# EAGLE board pcb (EAGLE 9.7.0)
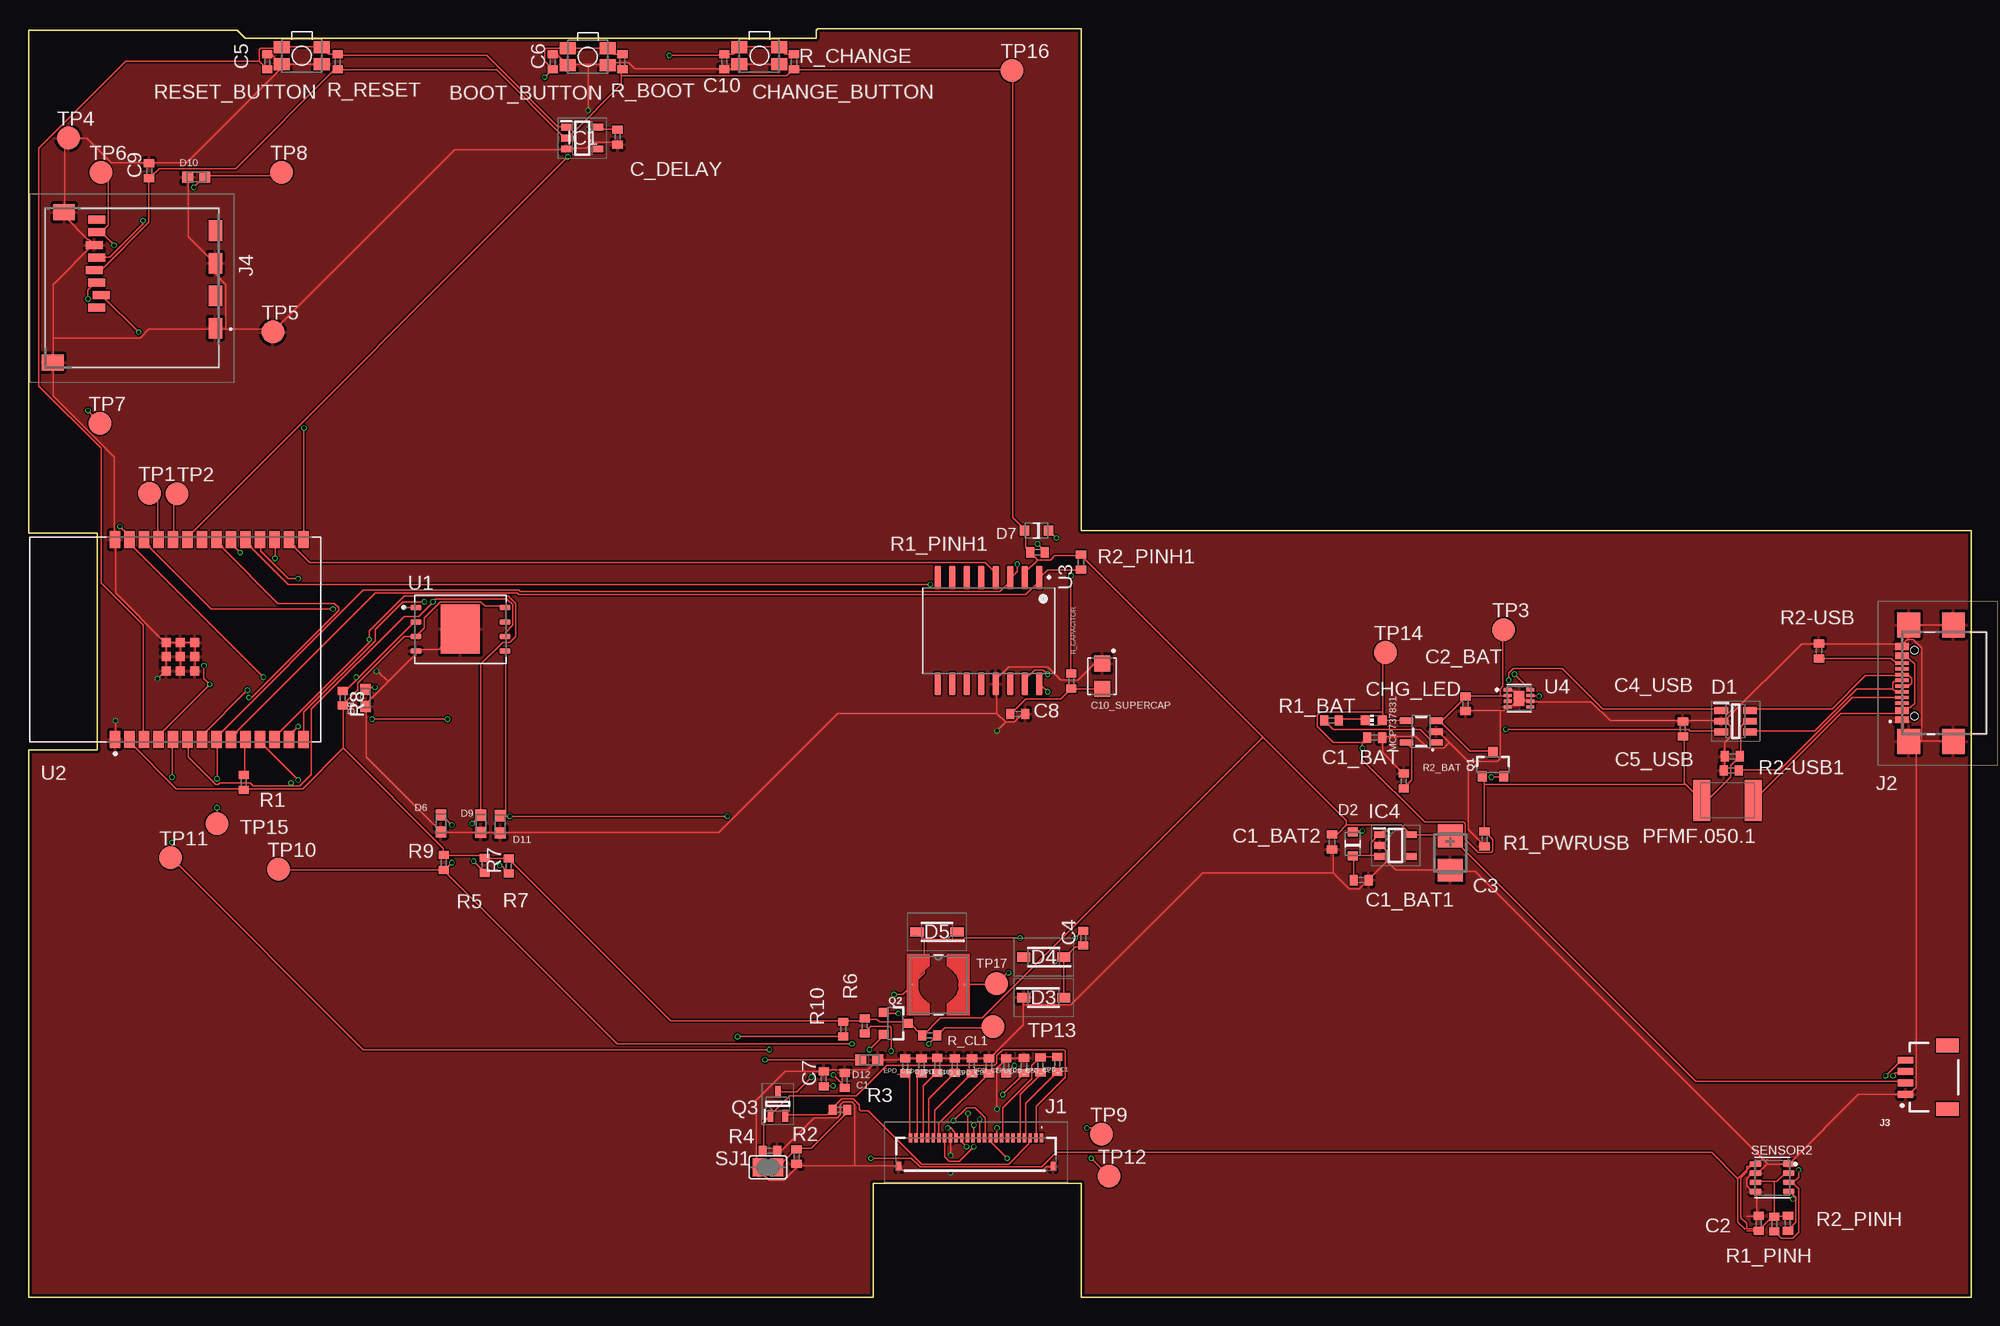
[diagram p0: board, top side]
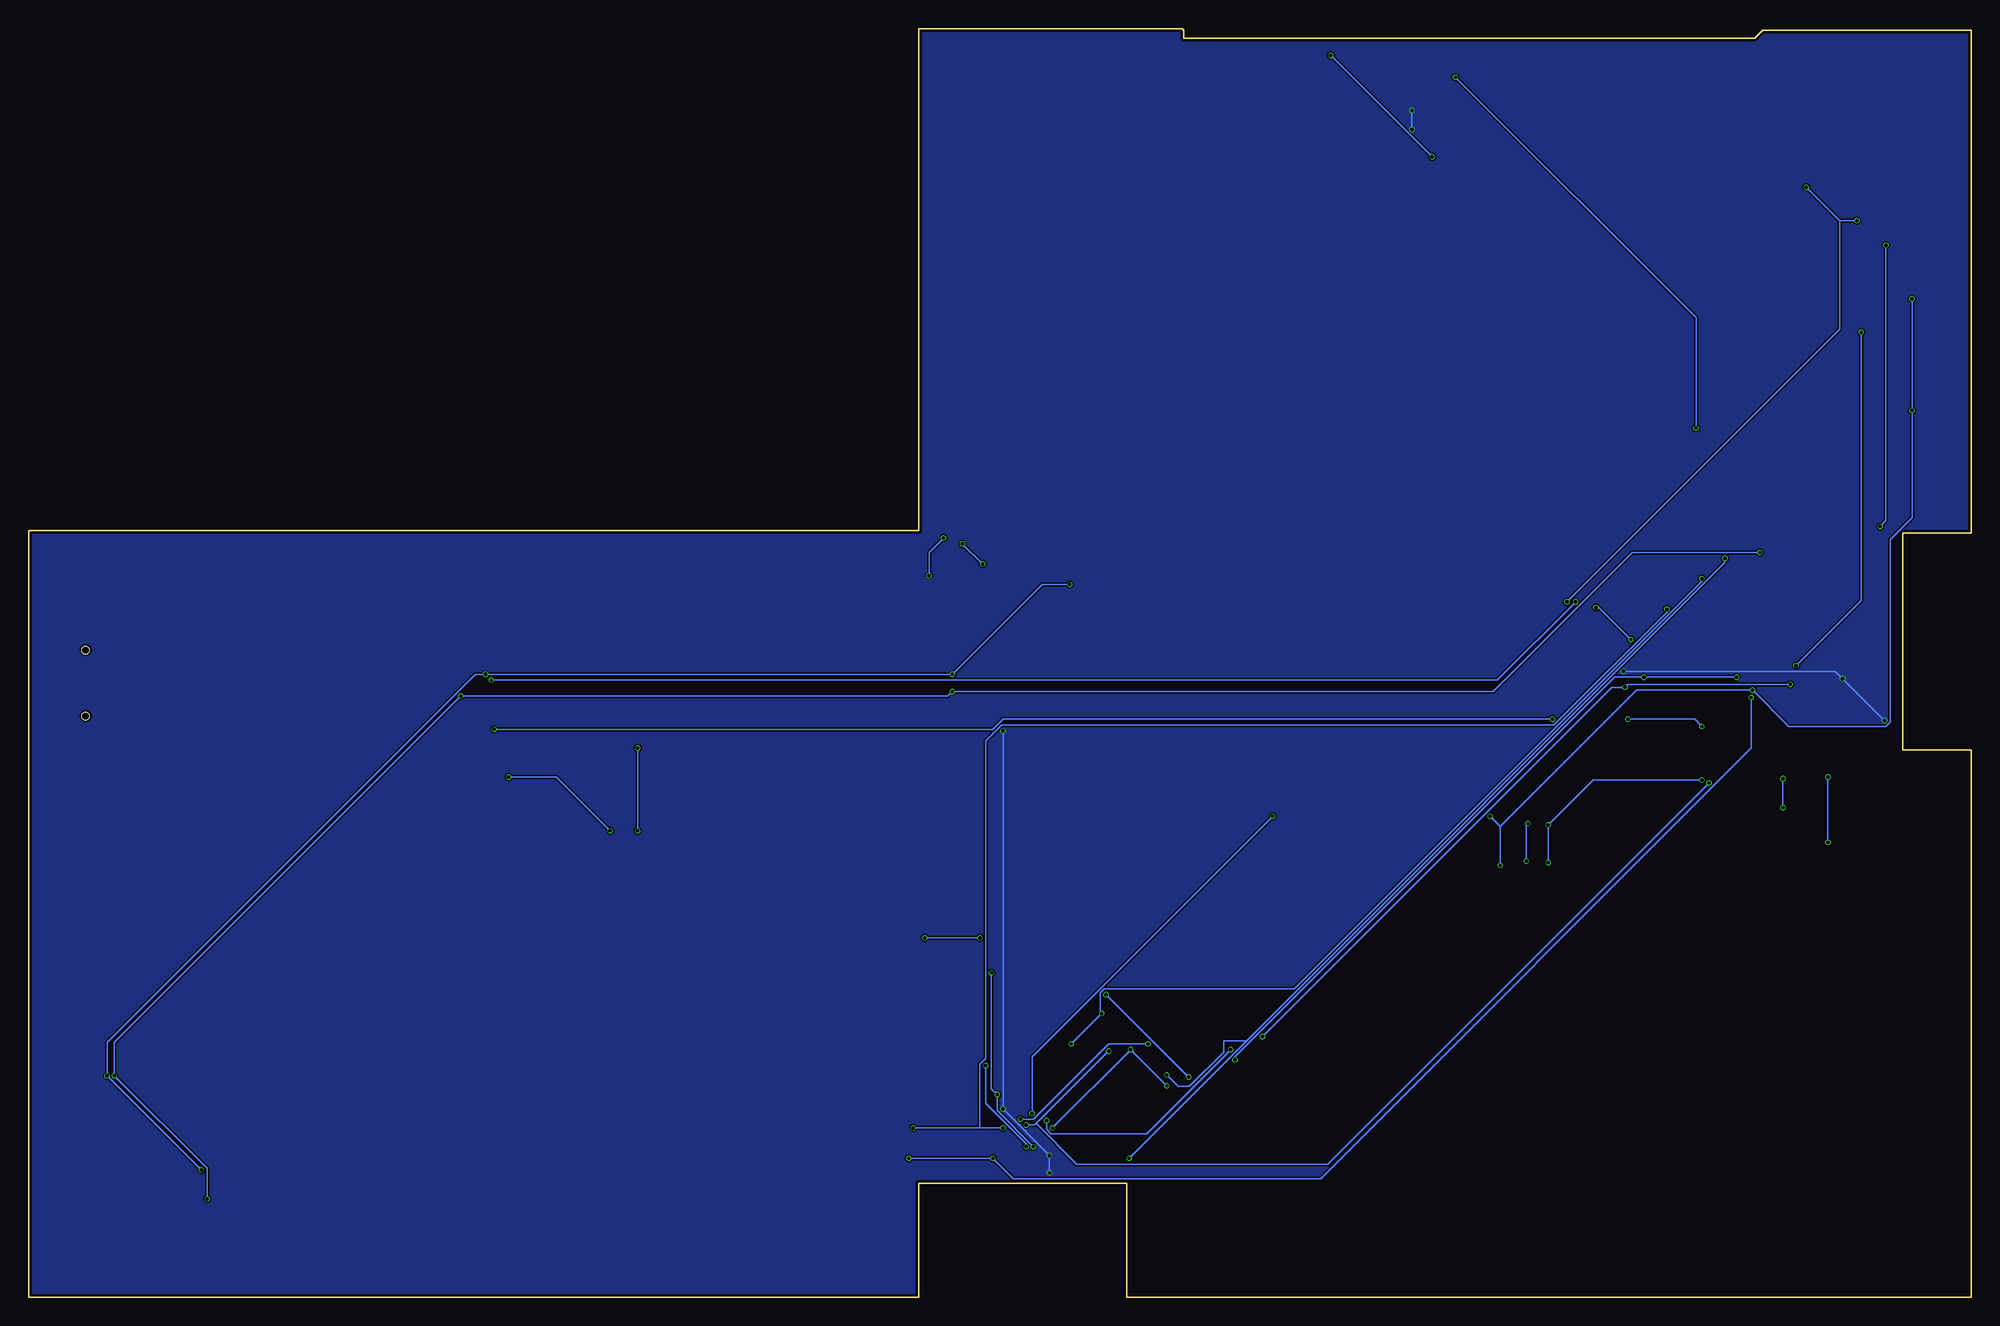
[diagram p1: board, bottom side, seen from below]

Size 170.2 x 111.2 mm. Coordinates in mm from the lower left corner, seen from the top.
Outline: 170.2,0 170.2,67.2 92.2,67.2 92.2,111.2 69.13,111.2 69,111.07 69,110.37 19,110.37 18.3,111.07 0.01,111.07 0.01,67 6,67 6,48 0,48 0,0 74,0 74,10 92.2,10 92.2,0 170.2,0
Copper layers (1*16): Top 0.035mm / dielectric 1.6mm / Bottom 0.035mm
Design rules "jlcpcb-2layers.dru": minimum track width 5mil, minimum drill 0.3mm, track to track 5mil, track to pad 5mil, pad to pad 5mil, via to via 5mil, smd to smd 5mil, copper to edge 0.2mm, drill to drill 6mil, minimum pad ring 10mil, minimum via ring 3mil, stop-mask expansion 4mil, vias tented up to drill 0mil, thermal gap 10mil

## Footprints (pad centres in the part's own frame; a part is rotated, then mirrored left to right if it is on the bottom)
MYBUTTON = smd 1.4 x 1.05: 1 1.75,0.75; 2 -1.75,0.75; 3 -1.75,-0.75; 4 1.75,-0.75
EAGLE-LTSPICE_C0402 = smd 0.7 x 0.9: 1 -0.65,0; 2 0.65,0
RCL_CT3528 = smd 2 x 2.2: + -1.5,0; - 1.5,0
CAPCP3225X100N = smd 1.4 x 1.4: 1 -1.1,0; 2 1.1,0
ADAFRUIT_CHIP-LED0603 = smd 0.8 x 0.8: A 0,-0.75; C 0,0.75
SOT95P280X145-6N = smd 1.2 x 0.6: 1 -1.25,0.95; 2 -1.25,0; 3 -1.25,-0.95; 4 1.25,-0.95; 5 1.25,0; 6 1.25,0.95
ESP32_WROVER_AVX---SD0805S020S1R0_AVX_SD0805S020S1R0_0 = smd 0.8 x 0.9: 1 -1.05,0; 2 1.05,0
SOD3716X135N = smd 1.15 x 0.8: 1 -1.75,0; 2 1.75,0
DIOC1608X36N = smd 0.97 x 0.94: 1 -0.75,0; 2 0.75,0
SOT95P280X125-5N = smd 0.9 x 0.6: 1 -1.4,0.95; 2 -1.4,0; 3 -1.4,-0.95; 4 1.4,-0.95; 5 1.4,0.95
SOT95P280X120-5N = smd 0.9 x 0.6: 1 -1.4,0.95; 2 -1.4,0; 3 -1.4,-0.95; 4 1.4,-0.95; 5 1.4,0.95
FH34SRJ24S05SH99 = smd 0.3 x 0.8: 1 5.75,1.45; 2 5.25,1.45; 3 4.75,1.45; 4 4.25,1.45; 5 3.75,1.45; 6 3.25,1.45; 7 2.75,1.45; 8 2.25,1.45; 9 1.75,1.45; 10 1.25,1.45; 11 0.75,1.45; 12 0.25,1.45; 13 -0.25,1.45; 14 -0.75,1.45; 15 -1.25,1.45; 16 -1.75,1.45; 17 -2.25,1.45; 18 -2.75,1.45; 19 -3.25,1.45; 20 -3.75,1.45; 21 -4.25,1.45; 22 -4.75,1.45; 23 -5.25,1.45; 24 -5.75,1.45 | smd 0.4 x 0.8: MP1 6.75,-1.05; MP2 -6.75,-1.05
SAMACSYS_PARTS_USB4110GFA = smd 0.3 x 1.15: A1 -3.35,3.678; A4 -2.55,3.678; A5 -1.25,3.678; A6 -0.25,3.678; A7 0.25,3.678; A8 1.25,3.678; A9 2.55,3.678; A12 3.35,3.678; B1 3.05,3.678; B4 2.25,3.678; B5 1.75,3.678; B6 0.75,3.678; B7 -0.75,3.678; B8 -1.75,3.678; B9 -2.25,3.678; B12 -3.05,3.678 | smd 2.18 x 2: MP1 -5.11,-0.827; MP2 5.11,-0.827; MP3 -5.11,3.103; MP4 5.11,3.103 | hole 0.65: -2.89,2.603; 2.89,2.603
JST04_1MM_RA = smd 0.6 x 1.35: 1 -1.5,0; 2 -0.5,0; 3 0.5,0; 4 1.5,0 | smd 1.2 x 2: NC1 2.8,-3.675; NC2 -2.8,-3.675
112ATAARR03ATTEND = smd 1.8 x 1.2: G1 10.6,10.4; G2 4.9,10.4; S1 7.75,10.4; S2 2.05,10.4 | smd 1.4 x 1.9: G3 13.6,-3.85; G4 0.45,-2.85 | smd 0.7 x 1.5: P1 8.8,0; P2 7.7,0.4; P3 6.6,0; P4 5.5,-0.2; P5 4.4,0; P6 3.3,-0.2; P7 2.2,0; P8 1.1,0
IND_4828-WE-TPC_WRE = smd 0.127 x 0.127: 1 -2.286,0; 2 2.286,0
ESP32_WROVER_SPARKFUN-IC-POWER_SOT23-5 = smd 0.55 x 1.2: 1 -0.95,-1.3; 2 0,-1.3; 3 0.95,-1.3; 4 0.95,1.3; 5 -0.95,1.3
ESP32C6_VARISTOR_CT/CN1812 = smd 1.5 x 3.6: 1 -2.25,0; 2 2.25,0
ESP32_WROVER_SPARKFUN-DISCRETESEMI_SOT23-3 = smd 0.8 x 0.9: 1 -0.95,-1; 2 0.95,-1; 3 0,1.1
SOT65P210X110-3N = smd 1.05 x 0.5: 1 -1.05,0.65; 2 -1.05,-0.65; 3 1.05,0
ESP32_WROVER_EAGLE-LTSPICE_R0402 = smd 0.7 x 0.9: 1 -0.65,0; 2 0.65,0
ESP32_WROVER_BME680_PSON80P300X300X100-8N = smd 1.016 x 0.5: 1 1.458,1.2; 2 1.458,0.4; 3 1.458,-0.4; 4 1.458,-1.2; 5 -1.458,-1.22; 6 -1.458,-0.4; 7 -1.458,0.4; 8 -1.458,1.2
SJ = smd 1.168 x 1.6: 1 -0.762,0; 2 0.762,0
TP20R = smd 2 x 2: TP 0,0
SON127P600X800X80-9N = smd 0.94 x 0.44: 1 -3.895,1.905; 2 -3.895,0.635; 3 -3.895,-0.635; 4 -3.895,-1.905; 5 3.895,-1.905; 6 3.895,-0.635; 7 3.895,0.635; 8 3.895,1.905 | smd 3.4 x 4.3: 9 0,0
XCVR_ESP32-C6-WROOM-1-N8 = smd 1.5 x 0.9: 1 -8.75,5.26; 2 -8.75,3.99; 3 -8.75,2.72; 4 -8.75,1.45; 5 -8.75,0.18; 6 -8.75,-1.09; 7 -8.75,-2.36; 8 -8.75,-3.63; 9 -8.75,-4.9; 10 -8.75,-6.17; 11 -8.75,-7.44; 12 -8.75,-8.71; 13 -8.75,-9.98; 14 -8.75,-11.25; 15 8.75,-11.25; 16 8.75,-9.98; 17 8.75,-8.71; 18 8.75,-7.44; 19 8.75,-6.17; 20 8.75,-4.9; 21 8.75,-3.63; 22 8.75,-2.36; 23 8.75,-1.09; 24 8.75,0.18; 25 8.75,1.45; 26 8.75,2.72; 27 8.75,3.99; 28 8.75,5.26 | smd 0.8 x 0.8: 29_1 -2.755,0.79; 29_2 -1.505,0.79; 29_3 -0.255,0.79; 29_4 -2.755,-0.46; 29_5 -1.505,-0.46; 29_6 -0.255,-0.46; 29_7 -2.755,-1.71; 29_8 -1.505,-1.71; 29_9 -0.255,-1.71
SOIC127P1032X265-16N = smd 2.05 x 0.59: 1 -4.655,4.445; 2 -4.655,3.175; 3 -4.655,1.905; 4 -4.655,0.635; 5 -4.655,-0.635; 6 -4.655,-1.905; 7 -4.655,-3.175; 8 -4.655,-4.445; 9 4.655,-4.445; 10 4.655,-3.175; 11 4.655,-1.905; 12 4.655,-0.635; 13 4.655,0.635; 14 4.655,1.905; 15 4.655,3.175; 16 4.655,4.445
SON50P200X200X80-9N = smd 0.76 x 0.27: 1 -0.985,0.75; 2 -0.985,0.25; 3 -0.985,-0.25; 4 -0.985,-0.75; 5 0.985,-0.75; 6 0.985,-0.25; 7 0.985,0.25; 8 0.985,0.75 | smd 0.9 x 1.3: 9 0,0

## Placement (x,y rotation side)
BOOT_BUTTON  BUTTON_CUSYOMV1  [MYBUTTON]  49,108.73 180 top
C1  100 nF  [EAGLE-LTSPICE_C0402]  71.5,19.04 90 top
C1_BAT  4.7uF  [EAGLE-LTSPICE_C0402]  117.93,49.06 0 top
C1_BAT1  4.7uF  [EAGLE-LTSPICE_C0402]  116.75,36.58 0 top
C1_BAT2  4.7uF  [EAGLE-LTSPICE_C0402]  114.18,39.91 270 top
C2  100nF  [EAGLE-LTSPICE_C0402]  151.56,6.5 90 top
C2_BAT  4.7 nF  [EAGLE-LTSPICE_C0402]  125.88,52.03 270 top
C3  100uF TANT  [RCL_CT3528]  124.54,38.95 270 top
C4  4.7uF/25V  [EAGLE-LTSPICE_C0402]  92.4,31.49 90 top
C4_USB  100nF  [EAGLE-LTSPICE_C0402]  144.92,49.83 90 top
C5  1uF  [EAGLE-LTSPICE_C0402]  20.92,108.28 90 top
C5_USB  100 nF  [EAGLE-LTSPICE_C0402]  149.24,47.42 180 top
C6  100nF  [EAGLE-LTSPICE_C0402]  45.92,108.28 90 top
C7  10uF  [EAGLE-LTSPICE_C0402]  69.66,19.17 90 top
C8  100nF  [EAGLE-LTSPICE_C0402]  86.66,51.14 0 top
C9  100nF  [EAGLE-LTSPICE_C0402]  10.56,98.74 90 top
C10  100nF  [EAGLE-LTSPICE_C0402]  60.95,108.28 270 top
C10_SUPERCAP  CPH3225A  [CAPCP3225X100N]  94.05,54.44 270 top
C_DELAY  100nF  [EAGLE-LTSPICE_C0402]  51.6,101.69 270 top
CHANGE_BUTTON  BUTTON_CUSYOMV1  [MYBUTTON]  64.03,108.82 180 top
CHG_LED  [ADAFRUIT_CHIP-LED0603]  117.85,50.58 90 top
D1  USBLC6-2SC6Y  [SOT95P280X145-6N]  149.54,50.5 0 top
D2  ESP32_WROVER_AVX---SD0805S020S1R0_AVX_SD0805S020S1R0_0_0AVX_SD0805S020S1R0_0_0  [ESP32_WROVER_AVX---SD0805S020S1R0_AVX_SD0805S020S1R0_0]  116.01,39.75 90 top
D3  MBR0530  [SOD3716X135N]  88.92,26.28 0 top
D4  MBR0530  [SOD3716X135N]  88.94,29.82 180 top
D5  MBR0530  [SOD3716X135N]  79.58,32.04 180 top
D6  PGB1010603MR  [DIOC1608X36N]  36.12,41.55 90 top
D7  ESP32_WROVER_AVX---SD0805S020S1R0_AVX_SD0805S020S1R0_0_0AVX_SD0805S020S1R0_0_0  [ESP32_WROVER_AVX---SD0805S020S1R0_AVX_SD0805S020S1R0_0]  88.3,67.21 180 top
D8  PGB1010603MR  [DIOC1608X36N]  29.52,52.53 90 top
D9  PGB1010603MR  [DIOC1608X36N]  39.62,41.51 90 top
D10  PGB1010603MR  [DIOC1608X36N]  14.69,98.18 0 top
D11  PGB1010603MR  [DIOC1608X36N]  41.32,41.47 90 top
D12  PGB1010603MR  [DIOC1608X36N]  73.65,20.82 180 top
EPD_C1  1uF/50V  [EAGLE-LTSPICE_C0402]  90.12,20.44 90 top
EPD_C2  1uF/50V  [EAGLE-LTSPICE_C0402]  88.64,20.38 90 top
EPD_C5  0.1uF/50V  [EAGLE-LTSPICE_C0402]  87.2,20.33 90 top
EPD_C6  1uF/50V  [EAGLE-LTSPICE_C0402]  85.64,20.29 90 top
EPD_C7  1uF/50V  [EAGLE-LTSPICE_C0402]  84.14,20.3 90 top
EPD_C8  1uF/50V  [EAGLE-LTSPICE_C0402]  82.64,20.31 90 top
EPD_C9  1uF/50V  [EAGLE-LTSPICE_C0402]  81.14,20.32 90 top
EPD_C10  1uF/50V  [EAGLE-LTSPICE_C0402]  79.6,20.35 90 top
EPD_C11  1uF/50V  [EAGLE-LTSPICE_C0402]  78.22,20.31 90 top
EPD_C12  1uF/50V  [EAGLE-LTSPICE_C0402]  76.8,20.29 90 top
IC1  BD5229G-TR  [SOT95P280X125-5N]  48.51,101.6 0 top
IC4  XC6220A331MR-G  [SOT95P280X120-5N]  119.75,39.6 0 top
J1  FH34SRJ-24S-0.5SH_99_  [FH34SRJ24S05SH99]  83,12.54 0 top
J2  SAMACSYS_PARTS_USB4110-GF-A  [SAMACSYS_PARTS_USB4110GFA]  167.8,53.83 90 top
J3  QWIIC_RIGHT_ANGLE  [JST04_1MM_RA]  164.43,19.3 90 top
J4  112A-TAAR-R03_ATTEND  [112ATAARR03ATTEND]  5.97,95.54 270 top
L1  68mH  [IND_4828-WE-TPC_WRE]  79.7,27.4 0 top
MCP737831  ESP32_WROVER_SPARKFUN-IC-POWER_MCP73831  [ESP32_WROVER_SPARKFUN-IC-POWER_SOT23-5]  122,49.58 90 top
PFMF.050.1  ESP32C6_VARISTORCN1812  [ESP32C6_VARISTOR_CT/CN1812]  148.82,43.56 180 top
Q1  20V/4.2A/52mΩ/1.4W  [ESP32_WROVER_SPARKFUN-DISCRETESEMI_SOT23-3]  128.29,46.68 0 top
Q2  20V/4.2A/52mΩ/1.4W  [ESP32_WROVER_SPARKFUN-DISCRETESEMI_SOT23-3]  75.91,24.02 270 top
Q3  SI1308EDL-T1-GE3  [SOT65P210X110-3N]  65.64,16.95 90 top
R1  10K  [ESP32_WROVER_EAGLE-LTSPICE_R0402]  18.86,45.13 90 top
R1_BAT  200  [ESP32_WROVER_EAGLE-LTSPICE_R0402]  114.14,50.56 0 top
R1_PINH  10K  [ESP32_WROVER_EAGLE-LTSPICE_R0402]  152.92,6.43 90 top
R1_PINH1  10K  [ESP32_WROVER_EAGLE-LTSPICE_R0402]  88.39,65.3 180 top
R1_PWRUSB  100K  [ESP32_WROVER_EAGLE-LTSPICE_R0402]  127.55,40.18 270 top
R2  2.2  [ESP32_WROVER_EAGLE-LTSPICE_R0402]  67.28,12.35 90 top
R2-USB  5k1  [ESP32_WROVER_EAGLE-LTSPICE_R0402]  156.84,56.66 90 top
R2-USB1  5k1  [ESP32_WROVER_EAGLE-LTSPICE_R0402]  149.17,46.18 0 top
R2_BAT  2K  [ESP32_WROVER_EAGLE-LTSPICE_R0402]  120.46,45.25 270 top
R2_PINH  10K  [ESP32_WROVER_EAGLE-LTSPICE_R0402]  154.12,6.51 90 top
R2_PINH1  10K  [ESP32_WROVER_EAGLE-LTSPICE_R0402]  92.2,64.45 90 top
R3  0.47  [ESP32_WROVER_EAGLE-LTSPICE_R0402]  71.09,16.44 0 top
R4  10K  [ESP32_WROVER_EAGLE-LTSPICE_R0402]  64.95,12.84 0 top
R5  10K  [ESP32_WROVER_EAGLE-LTSPICE_R0402]  39.96,37.87 90 top
R6  10K  [ESP32_WROVER_EAGLE-LTSPICE_R0402]  73.26,23.79 90 top
R7  10K  [ESP32_WROVER_EAGLE-LTSPICE_R0402]  42.06,37.81 90 top
R8  10K  [ESP32_WROVER_EAGLE-LTSPICE_R0402]  27.52,52.51 270 top
R9  10K  [ESP32_WROVER_EAGLE-LTSPICE_R0402]  36.38,38.11 90 top
R10  10K  [ESP32_WROVER_EAGLE-LTSPICE_R0402]  71.36,23.51 90 top
R_BOOT  10K  [ESP32_WROVER_EAGLE-LTSPICE_R0402]  52.02,108.28 90 top
R_CAPACITOR  15  [ESP32_WROVER_EAGLE-LTSPICE_R0402]  91.35,54.02 90 top
R_CHANGE  10K  [ESP32_WROVER_EAGLE-LTSPICE_R0402]  67.05,108.28 90 top
R_CL1  10K  [ESP32_WROVER_EAGLE-LTSPICE_R0402]  78.94,22.96 0 top
R_RESET  10K  [ESP32_WROVER_EAGLE-LTSPICE_R0402]  27.09,108.28 90 top
RESET_BUTTON  BUTTON_CUSYOMV1  [MYBUTTON]  23.94,108.82 180 top
SENSOR2  ESP32_WROVER_BME680_BME680  [ESP32_WROVER_BME680_PSON80P300X300X100-8N]  152.74,10.5 0 top
SJ1  [SJ]  64.78,11.4 0 top
TP1  TPTP20R  [TP20R]  10.6,70.47 0 top
TP2  TPTP20R  [TP20R]  12.99,70.42 0 top
TP3  TPTP20R  [TP20R]  129.21,58.52 0 top
TP4  TPTP20R  [TP20R]  3.49,101.6 0 top
TP5  TPTP20R  [TP20R]  21.41,84.6 0 top
TP6  TPTP20R  [TP20R]  6.33,98.6 0 top
TP7  TPTP20R  [TP20R]  6.25,76.6 0 top
TP8  TPTP20R  [TP20R]  22.17,98.6 0 top
TP9  TPTP20R  [TP20R]  93.99,14.3 0 top
TP10  TPTP20R  [TP20R]  21.9,37.52 0 top
TP11  TPTP20R  [TP20R]  12.45,38.52 0 top
TP12  TPTP20R  [TP20R]  94.65,10.62 0 top
TP13  TPTP20R  [TP20R]  84.5,23.72 0 top
TP14  TPTP20R  [TP20R]  118.85,56.52 0 top
TP15  TPTP20R  [TP20R]  16.5,41.52 0 top
TP16  TPTP20R  [TP20R]  86.15,107.52 0 top
TP17  TPTP20R  [TP20R]  84.8,27.52 0 top
U1  W25Q512JVEIQ  [SON127P600X800X80-9N]  37.83,58.56 0 top
U2  ESP32-C6-WROOM-1-N8  [XCVR_ESP32-C6-WROOM-1-N8]  12.84,57.66 90 top
U3  DS3231SN#  [SOIC127P1032X265-16N]  84.1,58.43 270 top
U4  MAX17048G+T10  [SON50P200X200X80-9N]  130.57,52.5 0 top

## Library data of the parts
BOOT_BUTTON CHANGE_BUTTON CHG_LED PFMF.050.1 RESET_BUTTON SJ1 TP1-TP17 = DeskAssistant v19 v1
C1 C1_BAT C1_BAT1 C1_BAT2 C2 C2_BAT C4 C4_USB C5 C5_USB C6-C10 C_DELAY EPD_C1 EPD_C2 EPD_C5-EPD_C12 = DeskAssistant v19 v1; SPICEMODEL: NONE; SPICEPREFIX: C
C3 = DeskAssistant v19 v1; SPICEPREFIX: C
C10_SUPERCAP = DeskAssistant v19 v1; AVAILABILITY: Not in stock; CHECK_PRICES: https://www.snapeda.com/parts/CPH3225A/Seiko+Instruments/view-part/?ref=eda; DESCRIPTION: 11 mF (EDLC) Supercapacitor 3.3 V 1210 (3225 Metric) - -; MF: Seiko Instruments; MP: CPH3225A; PACKAGE: 1210 Seiko; PRICE: None; PURCHASE-URL: https://www.snapeda.com/api/url_track_click_mouser/?unipart_id=562593&manufacturer=Seiko Instruments&part_name=CPH3225A&search_term=None; SNAPEDA_LINK: https://www.snapeda.com/parts/CPH3225A/Seiko+Instruments/view-part/?ref=snap
D1 = DeskAssistant v19 v1; AVAILABILITY: In Stock; CHECK_PRICES: https://www.snapeda.com/parts/USBLC6-2SC6Y/STMicroelectronics/view-part/?ref=eda; DESCRIPTION: 17V Clamp 5A (8/20µs) Ipp Tvs Diode Surface Mount SOT-23-6; MF: STMicroelectronics; MP: USBLC6-2SC6Y; PACKAGE: SOT-23-6 STMicroelectronics; PRICE: None; SNAPEDA_LINK: https://www.snapeda.com/parts/USBLC6-2SC6Y/STMicroelectronics/view-part/?ref=snap
D2 D7 = DeskAssistant v19 v1; CENTROID_NOT_SPECIFIED: No; DATASHEET: http://datasheets.avx.com/schottky.pdf; DIGIKEY_DESCRIPTION: DIODE SCHOTTKY 20V 1A 0805; DIGIKEY_PART_NUMBER: 478-7800-1-ND; LEAD_FREE: yes; MF: AVX; MOUSER_PART_NUMBER: 581-SD0805S020S1R0; PACKAGE: 0805 (2012 metric); PREFIX: D; ROHS: yes; TEMPERATURE_RANGE_HIGH: +125°C; TEMPERATURE_RANGE_LOW: -55°C
D3-D5 = DeskAssistant v19 v1; AVAILABILITY: In Stock; CHECK_PRICES: https://www.snapeda.com/parts/MBR0530/Onsemi/view-part/?ref=eda; DESCRIPTION: Diode Schottky 30 V 500mA Surface Mount SOD-123; MF: ON Semiconductor; MP: MBR0530; PACKAGE: SOD-123-2 ON Semiconductor; PRICE: None; PURCHASE-URL: https://www.snapeda.com/api/url_track_click_mouser/?unipart_id=179458&manufacturer=ON Semiconductor&part_name=MBR0530&search_term=None; SNAPEDA_LINK: https://www.snapeda.com/parts/MBR0530/Onsemi/view-part/?ref=snap
D6 D8-D12 = DeskAssistant v19 v1; AVAILABILITY: In Stock; CHECK_PRICES: https://www.snapeda.com/parts/PGB1010603MR/Littelfuse/view-part/?ref=eda; DESCRIPTION: 150V (Typ) Clamp - Ipp Tvs Diode Surface Mount 0603 (1608 Metric); MF: Littelfuse Inc.; MP: PGB1010603MR; PACKAGE: 0603 Littelfuse Inc.; PRICE: None; PURCHASE-URL: https://www.snapeda.com/api/url_track_click_mouser/?unipart_id=5659453&manufacturer=Littelfuse Inc.&part_name=PGB1010603MR&search_term=None; SNAPEDA_LINK: https://www.snapeda.com/parts/PGB1010603MR/Littelfuse/view-part/?ref=snap
IC1 = DeskAssistant v19 v1; DESCRIPTION: Voltage Detector with Adjustable Delay Time: CMOS processes are utilized to develop high precision, low current consumption CMOS reset ICs that allow arbitrary setting of the delay time. The extensive lineup includes both Nch Open Drain and CMOS output types in a wide range of detection voltages (from 2.3V to 6.0V, in 0.1V steps), enabling selection of the ideal solution based on customer requirements. In addition, the entire series is of course both lead-free and RoHS-compliant.; HEIGHT: 1.25mm; MANUFACTURER_NAME: ROHM Semiconductor; MANUFACTURER_PART_NUMBER: BD5229G-TR; MOUSER_PART_NUMBER: 755-BD5229G-TR; MOUSER_PRICE-STOCK: https://www.mouser.co.uk/ProductDetail/ROHM-Semiconductor/BD5229G-TR?qs=4kLU8WoGk0vvnhrrYwdszw%3D%3D
IC4 = DeskAssistant v19 v1; DESCRIPTION: LDO Voltage Regulators; HEIGHT: 1.2mm; MANUFACTURER_NAME: Torex; MANUFACTURER_PART_NUMBER: XC6220A331MR-G; MOUSER_PART_NUMBER: 865-XC6220A331MR-G; MOUSER_PRICE-STOCK: https://www.mouser.co.uk/ProductDetail/Torex-Semiconductor/XC6220A331MR-G?qs=AsjdqWjXhJ8ZSWznL1J0gg%3D%3D
J1 = DeskAssistant v19 v1; DESCRIPTION: 24 Position FFC, FPC Connector Contacts, Top and Bottom 0.020" (0.50mm) Surface Mount, Right Angle; HEIGHT: 1.1mm; MANUFACTURER_NAME: Hirose; MANUFACTURER_PART_NUMBER: FH34SRJ-24S-0.5SH(99); MOUSER_PART_NUMBER: 798-FH34SRJ24S05SH99; MOUSER_PRICE-STOCK: https://www.mouser.co.uk/ProductDetail/Hirose-Connector/FH34SRJ-24S-0.5SH99?qs=vcbW%252B4%252BSTIpKBl5ap9J8Fw%3D%3D
J2 = DeskAssistant v19 v1; DESCRIPTION: CONN USB 2.0 TYPE-C R/A SMT; HEIGHT: 3.26mm; MANUFACTURER_NAME: GCT (GLOBAL CONNECTOR TECHNOLOGY); MANUFACTURER_PART_NUMBER: USB4110-GF-A; MOUSER_PART_NUMBER: 640-USB4110-GF-A; MOUSER_PRICE-STOCK: https://www.mouser.co.uk/ProductDetail/GCT/USB4110-GF-A?qs=KUoIvG%2F9IlYiZvIXQjyJeA%3D%3D
J3 = DeskAssistant v19 v1; PROD_ID: CONN-13694
J4 = DeskAssistant v19 v1; DESCRIPTION: Micro SD Card Socket, Push-Push Type, Top Mount, SMT, H=1.83mm, 10u; HEIGHT: 1.9mm; MANUFACTURER_NAME: ATTEND; MANUFACTURER_PART_NUMBER: 112A-TAAR-R03 ATTEND
L1 = DeskAssistant v19 v1; COPYRIGHT: Copyright (C) 2024 Ultra Librarian. All rights reserved.; MANUFACTURER_PART_NUMBER: 744043680; MFR_NAME: Wurth Electronics
MCP737831 = DeskAssistant v19 v1; PROD_ID: IC-09995
Q1 Q2 = DeskAssistant v19 v1; PROD_ID: TRAN-14388
Q3 = DeskAssistant v19 v1; AVAILABILITY: In Stock; CHECK_PRICES: https://www.snapeda.com/parts/SI1308EDL-T1-GE3/Vishay+Siliconix/view-part/?ref=eda; DESCRIPTION: Si1308EDL-T1-GE3 N-channel MOSFET Transistor, 1.5 A, 30 V, 3-Pin SC-70 | Siliconix / Vishay SI1308EDL-T1-GE3; MF: Vishay Siliconix; MP: SI1308EDL-T1-GE3; PACKAGE: SOT-323 Vishay Semiconductor; PRICE: None; PURCHASE-URL: https://www.snapeda.com/api/url_track_click_mouser/?unipart_id=274603&manufacturer=Vishay Siliconix&part_name=SI1308EDL-T1-GE3&search_term=None; SNAPEDA_LINK: https://www.snapeda.com/parts/SI1308EDL-T1-GE3/Vishay+Siliconix/view-part/?ref=snap
R1 R1_BAT R1_PINH R1_PINH1 R1_PWRUSB R2 R2-USB R2-USB1 R2_BAT R2_PINH R2_PINH1 R3-R10 R_BOOT R_CAPACITOR R_CHANGE R_CL1 R_RESET = DeskAssistant v19 v1; SPICEMODEL: NONE; SPICEPREFIX: R
SENSOR2 = DeskAssistant v19 v1; AVAILABILITY: Unavailable; DESCRIPTION: Integrated Environmental Unit; MF: Bosch Sensortec; MP: BME680; PACKAGE: LGA-8 Bosch Tools; PRICE: None
U1 = DeskAssistant v19 v1; AVAILABILITY: In Stock; CHECK_PRICES: https://www.snapeda.com/parts/W25Q512JVEIQ/Winbond+Electronics/view-part/?ref=eda; DESCRIPTION: FLASH - NOR Memory IC 512Mb (64M x 8) SPI - Quad I/O 133 MHz 8-WSON (8x6); MF: Winbond Electronics; MP: W25Q512JVEIQ; PACKAGE: Package; PRICE: None; SNAPEDA_LINK: https://www.snapeda.com/parts/W25Q512JVEIQ/Winbond+Electronics/view-part/?ref=snap
U2 = DeskAssistant v19 v1; AVAILABILITY: In Stock; CHECK_PRICES: https://www.snapeda.com/parts/ESP32-C6-WROOM-1-N8/Espressif+Systems/view-part/?ref=eda; DESCRIPTION: Multiprotocol Modules ESP32-C6 module, Wi-Fi 6 in 2.4 GHz band, Bluetooth 5, Zigbee 3.0 and Thread. ESP34-WROOM Compatible - ENGINEERING SAMPLE; MF: Espressif Systems; MP: ESP32-C6-WROOM-1-N8; PACKAGE: None; PRICE: None; SNAPEDA_LINK: https://www.snapeda.com/parts/ESP32-C6-WROOM-1-N8/Espressif+Systems/view-part/?ref=snap
U3 = DeskAssistant v19 v1; AVAILABILITY: In Stock; CHECK_PRICES: https://www.snapeda.com/parts/DS3231SN%23/Analog+Devices/view-part/?ref=eda; DESCRIPTION: Extremely Accurate I²C-Integrated RTC/TCXO/Crystal; MF: Analog Devices; MP: DS3231SN#; PACKAGE: SOIC-16 Maxim; PRICE: None; PURCHASE-URL: https://www.snapeda.com/api/url_track_click_mouser/?unipart_id=99048&manufacturer=Analog Devices&part_name=DS3231SN#&search_term=None; SNAPEDA_LINK: https://www.snapeda.com/parts/DS3231SN%23/Analog+Devices/view-part/?ref=snap
U4 = DeskAssistant v19 v1; AVAILABILITY: In Stock; CHECK_PRICES: https://www.snapeda.com/parts/MAX17048G+T10/Analog+Devices/view-part/?ref=eda; DESCRIPTION: 3µA 1-Cell/2-Cell Fuel Gauge with ModelGauge; MF: Analog Devices; MP: MAX17048G+T10; PACKAGE: TDFN-8 Maxim; PRICE: None; PURCHASE-URL: https://www.snapeda.com/api/url_track_click_mouser/?unipart_id=329239&manufacturer=Analog Devices&part_name=MAX17048G+T10&search_term=None; SNAPEDA_LINK: https://www.snapeda.com/parts/MAX17048G+T10/Analog+Devices/view-part/?ref=snap

## Nets
3V3: C1_BAT2.1 C3.+ C9.1 D7.2 IC1.2 IC4.5 J3.2 J4.P4 Q2.3 R1.1 R1_PINH1.2 R2_PINH1.2 R5.2 R6.2 R7.2 R8.2 R9.2 R10.2 R_BOOT.1 R_CHANGE.1 R_CL1.1 R_RESET.1 TP16.TP U1.3 U1.7 U1.8 U2.2 U3.2
32KHZ: R2_PINH1.1 U2.9 U3.1
DN: D1.4 J2.A7 J2.B7
DP: D1.6 J2.A6 J2.B6
EPD_3V3: C7.1 EPD_C5.1 J1.15 J1.16 L1.2 Q2.2 TP17.TP
EPD_3V3_C: Q2.1 R_CL1.2 TP13.TP U2.18
EPD_BUSY: J1.9 TP9.TP U2.26
EPD_CS: D6.2 J1.12 R9.1 TP10.TP U2.11
EPD_DC: J1.11 TP11.TP U2.5
EPD_RST: J1.10 TP12.TP U2.21
FLASH_CS: D9.2 R5.1 U1.1 U2.12
GDR: J1.2 Q3.1 R4.1
GND: BOOT_BUTTON.1 BOOT_BUTTON.2 C1.2 C1_BAT1.2 C1_BAT2.2 C1_BAT.2 C2.2 C2_BAT.2 C3.- C4_USB.2 C5.2 C5_USB.2 C6.2 C7.2 C8.2 C9.2 C10.2 C10_SUPERCAP.1 C_DELAY.2 CHANGE_BUTTON.1 CHANGE_BUTTON.2 D1.2 D3.1 D6.1 D8.1 D9.1 D10.1 D11.1 D12.1 EPD_C5.2 EPD_C6.2 EPD_C7.2 EPD_C8.2 EPD_C9.2 EPD_C10.2 EPD_C11.2 EPD_C12.2 IC1.3 IC4.2 J1.17 J1.MP1 J1.MP2 J2.A1 J2.A12 J2.B1 J2.B12 J2.MP1 J2.MP2 J2.MP3 J2.MP4 J3.1 J4.G1 J4.G2 J4.G3 J4.G4 J4.P6 MCP737831.2 R1_PWRUSB.2 R2-USB1.1 R2-USB.2 R2.1 R2_BAT.1 R4.2 RESET_BUTTON.1 RESET_BUTTON.2 SENSOR2.1 SENSOR2.5 SENSOR2.7 SJ1.1 TP4.TP TP5.TP U1.4 U1.9 U2.1 U2.28 U2.29_1 U2.29_2 U2.29_3 U2.29_4 U2.29_5 U2.29_6 U2.29_7 U2.29_8 U2.29_9 U3.13 U4.1 U4.4 U4.6 U4.9
I2C_PW: C1.1 C2.1 R1_PINH.2 R2_PINH.2 SENSOR2.2 SENSOR2.6 SENSOR2.8 U2.17
INT_RTC: R1_PINH1.1 TP15.TP U2.8 U3.3
IO/BOOT: BOOT_BUTTON.3 BOOT_BUTTON.4 C6.1 R_BOOT.2 U2.15
IO/CHANGE: C10.1 CHANGE_BUTTON.3 CHANGE_BUTTON.4 R_CHANGE.2 U2.23
MISO: D12.2 J4.P7 R8.1 TP6.TP U1.2 U2.27
MOSI: D11.2 J1.14 J4.P3 R7.1 TP7.TP U1.5 U2.7
N$1: C1_BAT1.1 D2.1 IC4.1 IC4.3 Q1.2
N$2: EPD_C12.1 J1.24
N$3: J2.A5 R2-USB1.2
N$4: CHG_LED.C R1_BAT.2
N$5: C4.1 D3.2 D4.1
N$6: MCP737831.1 R1_BAT.1
N$7: MCP737831.5 R2_BAT.2
N$8: EPD_C11.1 J1.23
N$9: J2.B5 R2-USB.1
N$10: EPD_C10.1 J1.22
N$11: EPD_C9.1 J1.21
N$12: EPD_C8.1 J1.20
N$13: EPD_C7.1 J1.19
N$14: EPD_C6.1 J1.18
N$15: C_DELAY.1 IC1.5
N$18: R1.2 U2.10
N$22: EPD_C1.2 EPD_C2.2 J1.8
N$23: EPD_C1.1 J1.4
N$24: EPD_C2.1 J1.5
N$26: D7.1 R_CAPACITOR.2
N$27: C8.1 C10_SUPERCAP.2 R_CAPACITOR.1
PREVGH: D5.1
PREVGL: D4.2
RESE: J1.3 Q3.2 R3.1
RESE': R2.2 R3.2 SJ1.2
RESET: C5.1 IC1.1 R_RESET.2 RESET_BUTTON.3 RESET_BUTTON.4 U2.3
RTC_RST: U2.16 U3.4
RX: TP2.TP U2.24
SCK: D10.2 J1.13 J4.P5 R6.1 TP8.TP U1.6 U2.6
SCL: J3.4 R2_PINH.1 SENSOR2.4 U2.20 U3.16 U4.7
SDA: J3.3 R1_PINH.1 SENSOR2.3 U2.19 U3.15 U4.8
SRC: C4.2 D5.2 L1.1 Q3.3
SS_SD: D8.2 J4.P2 R10.1 U2.4
TX: TP1.TP U2.25
USB_D+: D1.1 U2.14
USB_D-: D1.3 U2.13
VBAT: C2_BAT.1 MCP737831.3 Q1.3 TP3.TP U4.2 U4.3
VBUS: C1_BAT.1 C4_USB.1 C5_USB.1 CHG_LED.A D1.5 D2.2 MCP737831.4 PFMF.050.1.2 Q1.1 R1_PWRUSB.1 TP14.TP
VRTC: U3.14
VUSB: J2.A4 J2.A9 J2.B4 J2.B9 PFMF.050.1.1

## Tracks (layer width: path | path; a pad name or v marks a point on that pad's centre or on a via)
3V3
  Top 0.127: U2.2 8.89,48.9 8.89,48.64 12.95,44.58 18.8,44.58 R1.1 18.92,44.58 24,44.58 27.56,48.13 | U1.7 41.78,59.31 41.78,60.45 U1.8 41.66,60.58 40.01,60.58 39.62,60.96 36.07,60.96 34.67,59.56 34.67,58.67 34.04,58.04 U1.3 33.91,57.91 32.89,57.91 28.83,53.85 28.83,53.21 27.56,51.94 R8.2 27.56,51.82 27.56,48.13 | 27.56,48.13 36.32,39.37 36.32,38.86 R9.2 36.45,38.73 39.75,38.73 39.88,38.61 R5.2 40.01,38.48 42.04,38.48 R7.2 42.16,38.35 56.26,24.26 71.25,24.26 R10.2 71.37,24.26 73.03,24.26 73.15,24.38 R6.2 73.28,24.38 74.3,24.38 74.55,24.13 76.96,24.13 Q2.3 77.09,24.13 78.23,22.99 R_CL1.1 78.36,22.99 79.88,24.51 83.57,24.51 108.08,49.02 108.08,49.15 | J4.P4 5.84,90.04 6.35,90.04 10.54,94.23 10.54,98.04 C9.1 10.67,98.17 11.43,98.93 18.16,98.93 26.8,107.57 27.05,107.57 R_RESET.1 27.18,107.57 41.02,107.57 46.99,101.6 IC1.2 47.5,101.98 47.62,101.98 51.94,106.3 51.94,107.06 | 51.94,107.06 51.94,107.57 R_BOOT.1 | 51.94,107.06 66.42,107.06 66.93,107.57 R_CHANGE.1 67.06,107.57 86.11,107.57 TP16.TP 86.23,107.44 86.23,68.33 87.25,67.31 D7.2 87.38,67.18 87.38,65.66 87.63,65.41 R1_PINH1.2 87.76,65.28 88.39,64.64 | 88.39,64.64 89.53,64.64 89.92,65.02 92.08,65.02 R2_PINH1.2 92.2,65.02 108.08,49.15 | 88.39,64.64 87.38,63.63 87.38,63.12 U3.2 | 115.44,41.4 114.68,40.64 114.3,40.64 C1_BAT2.1 | 115.44,41.4 120.27,41.4 121.03,40.64 IC4.5 121.16,40.51 124.46,40.51 C3.+ 124.59,40.39 146.05,18.92 164.34,18.92 J3.2 | 108.08,49.15 115.44,41.78 115.44,41.4
32KHZ
  Top 0.127: R2_PINH1.1 92.08,63.75 89.28,63.75 88.65,63.12 U3.1 88.52,62.99 88.52,62.74 87.38,61.59 42.93,61.59 42.8,61.72 30.35,61.72 18.29,49.66 18.29,49.53 17.78,49.02 U2.9
DN
  Top 0.127: 163.32,53.34 163.58,53.09 164.08,53.09 J2.B7 | 163.32,53.34 163.32,53.85 163.45,53.98 164.08,53.98 J2.A7 | 163.32,53.34 160.15,53.34 156.46,49.66 150.88,49.66 D1.4
DP
  Top 0.127: J2.A6 164.21,53.59 164.72,53.59 164.97,53.85 164.97,54.23 164.72,54.48 164.21,54.48 J2.B6 164.08,54.48 160.91,54.48 157.99,51.56 150.88,51.56 D1.6
EPD_3V3  (via drill 0.3)
  Top 0.127: v70.48,18.54 69.72,18.54 C7.1 | v73.66,21.72 74.93,22.99 Q2.2 | L1.2 82.04,27.43 84.71,27.43 TP17.TP 84.84,27.56 85.72,28.45 v85.85,28.45 | v85.34,17.78 87.12,19.56 EPD_C5.1 | v82.17,13.21 81.79,13.59 81.79,13.97 J1.15 81.66,14.1 81.28,14.1 J1.16 81.15,14.1 81.15,14.48 80.77,14.86 v80.52,14.86
  Bottom 0.127: v70.48,18.54 v73.66,21.72 v80.52,14.86 | v82.17,13.21 85.34,16.38 v85.34,17.78 85.85,18.29 v85.85,28.45
EPD_3V3_C  (via drill 0.3)
  Top 0.127: v76.2,24.89 74.93,24.89 Q2.1 | v78.87,22.23 79.5,22.86 R_CL1.2 79.63,22.99 80.26,23.62 84.45,23.62 TP13.TP | v23.62,62.99 22.73,62.99 20.32,65.41 20.32,66.29 U2.18
  Bottom 0.127: v78.87,22.23 76.33,24.77 | v23.62,62.99 23.62,62.74 59.31,27.05 75.95,27.05 76.33,26.67 76.33,24.77 | 76.33,24.77 v76.2,24.89
EPD_BUSY  (via drill 0.3)
  Top 0.127: v84.84,14.86 84.84,14.1 J1.9 | v92.71,14.86 93.47,14.86 93.98,14.35 TP9.TP | v26.67,60.33 16,60.33 10.67,65.66 10.67,65.79 10.16,66.29 U2.26
  Bottom 0.127: v92.71,14.86 86.87,14.86 | 86.87,14.86 v84.84,14.86 | v26.67,60.33 26.67,60.07 36.58,50.16 84.96,50.16 86.36,48.77 86.36,20.95 86.87,20.45 86.87,14.86
EPD_CS  (via drill 0.3)
  Top 0.127: v83.31,15.62 83.31,14.1 J1.12 | v72.14,22.23 51.56,22.23 36.45,37.34 R9.1 | v37.08,41.4 36.2,42.29 D6.2 | v37.08,38.1 36.45,37.47 R9.1 | v23.62,45.34 20.32,48.64 20.32,48.9 U2.11 | TP10.TP 21.97,37.47 36.32,37.47 R9.1
  Bottom 0.127: v83.31,15.62 82.17,15.62 75.56,22.23 v72.14,22.23 | v37.08,38.1 v37.08,41.4 33.15,45.34 v23.62,45.34
EPD_DC  (via drill 0.3)
  Top 0.127: v81.03,15.49 82.17,16.64 82.93,16.64 83.82,15.75 83.82,14.1 J1.11 | v64.9,21.72 29.34,21.72 12.57,38.48 TP11.TP 12.57,38.61 v12.57,39.88 | v12.57,45.59 12.57,48.9 U2.5
  Bottom 0.127: v81.03,15.49 81.03,14.73 80.64,14.35 72.26,14.35 v64.9,21.72 | v12.57,39.88 v12.57,45.59
EPD_RST  (via drill 0.3)
  Top 0.127: v85.72,12.19 84.33,13.59 84.33,13.97 J1.10 | v93.09,12.19 94.61,10.67 TP12.TP | v19.3,52.58 19.56,52.58 27.18,60.2 27.18,60.45 26.8,60.83 21.84,60.83 17.02,65.66 17.02,65.79 16.51,66.29 U2.21
  Bottom 0.127: v93.09,12.19 v85.72,12.19 83.95,10.41 57.02,10.41 19.3,48.13 v19.3,52.58
FLASH_CS  (via drill 0.3)
  Top 0.127: v38.99,38.23 39.88,37.34 R5.1 | v38.86,41.53 39.5,42.16 D9.2 39.62,42.29 39.62,55.5 41.53,57.4 42.16,57.4 42.67,57.91 42.67,60.83 42.04,61.47 32.89,61.47 29.84,58.42 v29.84,57.66 29.84,57.4 21.46,49.02 U2.12 | v32.89,60.45 33.91,60.45 U1.1
  Bottom 0.127: v38.99,38.23 38.99,41.4 v38.86,41.53 | v32.89,60.45 32.64,60.45 v29.84,57.66
GDR
  Top 0.127: J1.2 88.27,14.1 88.27,16.76 90.81,19.3 90.81,21.59 90.68,21.72 85.34,21.72 84.84,21.21 84.84,20.57 84.58,20.32 75.18,20.32 72.52,17.65 66.67,17.65 65.02,16 Q3.1 64.9,15.88 64.39,15.37 64.39,12.95 R4.1
GND  (via drill 0.3)
  Top 0.127: EPD_C5.2 87.12,20.95 85.72,20.95 EPD_C6.2 85.6,20.83 84.84,20.07 v84.84,16.51 | 67.44,11.56 72.39,11.56 | 72.39,11.56 76.2,11.56 J1.MP2 76.33,11.43 76.58,11.18 80.77,11.18 | 67.44,11.56 67.31,11.68 R2.1 67.44,11.56 | 80.77,11.18 88.9,11.18 89.15,11.43 89.66,11.43 J1.MP1 | v80.77,12.45 80.77,13.97 J1.17 | 80.77,11.18 v80.77,10.92 | 72.39,11.56 72.39,16.89 72.14,17.14 71.37,17.14 71.12,16.89 71.12,16 70.87,15.75 68.83,15.75 66.04,12.95 65.66,12.95 R4.2 | 67.44,11.56 66.17,10.29 64.9,10.29 64.14,11.05 64.14,11.3 SJ1.1 64.01,11.43 64.01,11.94 63.75,12.19 63.75,17.27 66.29,19.81 69.6,19.81 C7.2 69.72,19.94 73.53,19.94 74.3,20.7 D12.1 74.42,20.83 76.71,20.83 EPD_C12.2 76.83,20.95 78.11,20.95 EPD_C11.2 78.23,20.95 79.5,20.95 EPD_C10.2 79.63,20.95 81.03,20.95 EPD_C9.2 81.15,20.95 82.55,20.95 EPD_C8.2 82.68,20.95 84.07,20.95 EPD_C7.2 84.2,20.95 87.12,23.88 87.12,25.65 | 119,38.23 117.47,36.7 C1_BAT1.2 117.35,36.58 116.59,35.81 115.7,35.81 114.3,37.21 | 119,38.23 119,39.12 118.62,39.5 118.36,39.5 IC4.2 | 114.3,37.21 114.3,39.24 C1_BAT2.2 | 119,38.23 119.76,37.47 124.46,37.47 C3.- 124.59,37.34 126.75,37.34 152.4,11.68 | 87.12,25.65 87.12,26.16 D3.1 | 114.3,37.21 102.87,37.21 91.31,25.65 87.12,25.65 | U4.9 130.56,52.45 129.92,51.82 129.67,51.82 U4.4 129.54,51.69 129.29,51.44 128.91,51.44 | U4.1 129.67,53.21 129.92,53.21 130.56,52.58 U4.9 | U4.9 130.68,52.45 130.81,52.32 131.44,52.32 U4.6 131.57,52.2 136.91,52.2 138.56,50.55 144.91,50.55 C4_USB.2 145.03,50.55 148.21,50.55 D1.2 | 128.91,51.44 125.98,51.44 C2_BAT.2 | R2_BAT.1 120.4,45.97 118.62,47.75 118.62,49.02 C1_BAT.2 118.62,49.15 121.54,49.15 122.56,48.13 123.95,48.13 124.46,48.64
  Top 0.127: 126.11,46.99 126.11,41.02 127.51,39.62 R1_PWRUSB.2 | 124.46,48.64 123.57,49.53 123.32,49.53 MCP737831.2 | 124.46,48.64 126.11,46.99 | 128.91,51.44 128.91,47.24 128.65,46.99 126.11,46.99 | 151.38,7.11 151.51,7.11 C2.2 151.38,7.11 | 151.38,7.11 150.5,7.11 | 151.38,7.11 151.38,9.27 SENSOR2.5 151.26,9.4 150.88,9.4 150.5,9.78 150.5,10.41 150.88,10.79 151.26,10.79 SENSOR2.7 151.38,10.79 152.27,11.68 152.4,11.68 | 152.4,11.68 154.18,11.68 SENSOR2.1 154.31,11.81 160.27,17.78 164.34,17.78 J3.1 164.47,17.91 164.85,17.91 165.35,18.41 165.35,48.77 | J2.B12 164.08,50.67 164.08,50.55 J2.A1 164.21,50.42 164.21,49.15 164.59,48.77 J2.MP3 | 165.35,48.77 164.72,48.77 J2.MP3 | 165.35,48.77 165.86,48.77 | 165.86,48.77 168.53,48.77 J2.MP1 | R2-USB1.1 148.59,46.23 C5_USB.2 148.59,48.64 149.1,49.15 149.1,50.04 148.72,50.42 | 148.72,50.42 148.34,50.42 D1.2 | J2.A12 164.08,57.28 156.84,57.28 R2-USB.2 156.72,57.28 155.32,57.28 148.72,50.67 148.72,50.42 | J2.B1 164.08,56.9 164.08,57.15 J2.A12 | 164.59,57.66 164.59,58.93 J2.MP4 164.72,58.93 168.53,58.93 J2.MP2 | 164.59,57.66 164.21,57.28 J2.A12 | 148.72,50.42 D1.2 | 165.86,48.77 165.86,56.9 165.1,57.66 164.59,57.66 | 165.35,48.77 J2.MP3 | 85.6,50.42 86.36,50.42 87,51.05 87.25,51.05 C8.2 | 84.84,51.18 85.6,50.42 | 84.84,51.18 84.84,53.72 U3.13 84.84,53.85 84.84,54.23 85.85,55.24 89.28,55.24 90.42,54.1 91.95,54.1 93.34,55.5 93.98,55.5 C10_SUPERCAP.1 | U1.9 37.72,58.55 35.94,56.77 34.04,56.77 U1.4 33.91,56.64 33.91,56.39 31.5,53.98 | 31.5,53.98 29.59,52.07 29.59,51.82 D8.1 29.59,51.69 29.59,47.37 36.07,40.89 D6.1 36.2,40.77 39.5,40.77 D9.1 41.27,40.77 D11.1 41.4,40.77 60.45,40.77 70.87,51.18 84.84,51.18
  Top 0.127: CHANGE_BUTTON.2 65.66,108.08 62.36,108.08 CHANGE_BUTTON.1 62.23,107.95 61.98,107.7 60.96,107.7 C10.2 60.83,107.7 53.09,107.7 52.58,108.2 50.93,108.2 50.8,108.08 BOOT_BUTTON.2 50.67,108.08 49.02,108.08 | C6.2 45.97,108.84 46.35,108.84 47.24,107.95 BOOT_BUTTON.1 47.37,108.08 49.02,108.08 | D10.1 13.97,98.17 13.97,92.96 16.26,90.68 J4.G2 16.38,90.55 16.38,89.66 17.27,88.77 17.27,84.84 | 49.4,101.22 48.9,100.71 47.12,100.71 IC1.3 46.99,100.58 37.34,100.58 21.46,84.71 TP5.TP 21.34,84.71 21.21,84.84 17.27,84.84 | 49.4,101.22 51.44,101.22 51.56,101.09 C_DELAY.2 | 17.27,84.84 16.38,84.84 J4.G1 16.26,84.84 10.54,84.84 9.78,84.07 2.16,84.07 | v49.02,104.01 49.02,108.08 | v49.02,102.36 49.02,101.6 49.4,101.22 | U2.29_4 13.34,54.99 13.34,56.13 U2.29_5 13.34,56.26 13.34,57.28 U2.29_6 | U2.29_7 14.61,54.99 14.61,56.13 U2.29_8 14.61,56.26 14.61,57.28 U2.29_9 14.48,57.4 13.34,57.4 U2.29_6 | U2.29_3 12.06,57.28 12.06,56.26 U2.29_2 12.06,56.13 12.06,54.99 U2.29_1 11.94,54.86 v11.3,54.23 | v7.62,50.55 7.62,49.02 U2.1 | U2.29_3 11.94,57.4 7.62,61.72 7.62,66.29 U2.28 7.49,66.42 7.49,73.66 2.16,78.99 2.16,81.92 J4.G3 2.16,82.04 2.16,84.07 | U2.29_6 13.21,57.4 12.06,57.4 U2.29_3 | 5.71,92.33 5.33,92.71 5.21,92.71 3.17,94.74 3.17,95 J4.G4 3.17,95.12 3.17,101.35 3.43,101.6 TP4.TP 5.08,101.6 7.24,99.44 10.54,99.44 C9.2 10.67,99.44 13.84,99.44 22.1,107.7 22.1,107.95 RESET_BUTTON.1 | 2.16,84.07 2.16,88.77 5.71,92.33 | 5.71,92.33 J4.P6 | C5.2 20.95,108.84 21.34,108.84 22.1,108.08 RESET_BUTTON.1 | RESET_BUTTON.2 25.65,108.08 22.23,108.08 RESET_BUTTON.1 | 31.5,53.98 30.61,54.86 v30.48,54.86
  Top 0.127: 85.6,50.42 v84.84,49.66
  Bottom 0.127: v80.77,10.92 v80.77,12.45 v84.84,16.51 v84.84,49.66 | v49.02,102.36 v49.02,104.01 | v7.62,50.55 v11.3,54.23 11.94,54.86 v30.48,54.86
  pour Top: 0.08,0.08 169.92,0.08 169.92,109.97 168.97,110.92 0.08,110.92
  pour Bottom: 0.08,0.08 169.92,0.08 169.92,110.92 0.08,110.92
I2C_PW  (via drill 0.3)
  Top 0.127: 152.91,10.16 153.16,10.16 153.8,10.79 154.18,10.79 SENSOR2.2 | 152.91,10.16 151.38,10.16 SENSOR2.6 | R1_PINH.2 153.03,7.11 154.05,7.11 R2_PINH.2 | 150.5,5.84 151.51,5.84 C2.1 | 149.73,10.41 151,11.68 151.26,11.68 SENSOR2.8 151,11.5 150.5,11.5 150.5,11 150,10.5 150,7 150.5,6.5 150.5,6 151.5,6 C2.1 | 149.73,10.41 149.73,6.6 150.37,5.97 | R1_PINH.2 152.91,6.99 152.65,6.99 151.64,5.97 C2.1 | v21.59,64.77 21.59,66.29 U2.17 | v73.79,12.19 77.34,12.19 78.11,11.43 88.77,11.43 90.04,12.7 147.45,12.7 149.73,10.41 | 152.91,10.16 152.91,7.11 R1_PINH.2 | v70.5,19.5 71.5,18.5 C1.1
  Bottom 0.127: v21.59,64.77 21.59,64.39 63.49,22.49 | v73.79,12.19 63.49,22.49 | v70.5,19.5 69.5,18.5 68.5,18.5 65.5,21.5 65.5,22.5 63.5,22.5 63.49,22.49
INT_RTC  (via drill 0.3)
  Top 0.127: v88.39,66.04 89.03,65.41 R1_PINH1.1 | v86.61,64.26 86.61,63.63 86.11,63.12 U3.3 85.98,62.99 85.98,62.74 85.09,61.85 43.05,61.85 42.93,61.98 29.34,61.98 16.38,49.02 U2.8 16.51,48.9 v16.51,45.47 | v16.51,42.93 TP15.TP
  Bottom 0.127: v86.61,64.26 v88.39,66.04 | v16.51,42.93 v16.51,45.47
IO/BOOT  (via drill 0.3)
  Top 0.127: R_BOOT.2 51.94,108.97 51.31,108.97 50.8,109.47 BOOT_BUTTON.3 50.67,109.47 47.37,109.47 BOOT_BUTTON.4 45.34,109.47 45.21,109.35 45.21,108.33 45.85,107.7 C6.1 45.85,107.57 v45.21,106.93 | v24.13,76.2 24.13,66.42 U2.15
  Bottom 0.127: v24.13,76.2 24.13,85.85 v45.21,106.93
IO/CHANGE  (via drill 0.3)
  Top 0.127: R_CHANGE.2 66.93,108.97 66.29,108.97 65.79,109.47 CHANGE_BUTTON.3 65.66,109.6 62.36,109.6 CHANGE_BUTTON.4 62.23,109.47 61.72,108.97 60.96,108.97 C10.1 60.83,108.84 v56.13,108.84 | v47.24,99.95 13.97,66.67 13.97,66.42 U2.23
  Bottom 0.127: v56.13,108.84 v47.24,99.95
MISO  (via drill 0.3)
  Top 0.127: 6.35,93.34 J4.P7 6.35,93.34 | 6.35,93.34 6.99,93.98 6.99,97.92 6.35,98.55 TP6.TP | 28.83,54.23 33.91,59.31 U1.2 | 28.83,54.23 27.81,53.21 27.56,53.21 R8.1 | v64.52,20.83 D12.2 | 28.83,54.23 v28.7,54.36 | v20.57,54.36 8.89,66.04 8.89,66.29 U2.27 8.76,66.42 8.76,66.8 v8,67.56 | v7.49,92.2 6.35,93.34
  Bottom 0.127: v64.52,20.83 64.52,21.08 31.24,54.36 v28.7,54.36 v20.57,54.36 | v7.49,92.2 7.49,68.07 v8,67.56
MOSI  (via drill 0.3)
  Top 0.127: v5.21,87.5 5.21,88.27 5.84,88.9 J4.P3 | v5.21,77.72 6.22,76.71 TP7.TP | v82.3,16.13 82.3,14.1 J1.14 | 41.78,42.16 41.4,42.16 D11.2 41.78,42.16 | 41.78,42.16 v42.16,42.16 v61.21,42.16 | v41.27,37.85 41.4,37.85 42.04,37.21 R7.1 | 41.78,42.16 41.78,56.64 U1.5 | v19.18,53.21 15.24,49.28 15.24,49.02 U2.7
  Bottom 0.127: v5.21,87.5 v5.21,77.72 5.21,68.33 7.11,66.42 7.11,50.42 7.49,50.04 16,50.04 v19.18,53.21 29.34,53.21 41.27,41.27 | v82.3,16.13 82.3,21.08 v61.21,42.16 | 41.27,41.27 v41.27,37.85 | v42.16,42.16 41.27,41.27
N$1  (via drill 0.3)
  Top 0.127: C1_BAT1.1 116.08,36.7 116.08,38.61 D2.1 116.08,38.73 117.6,38.73 | 117.6,38.73 118.24,38.73 IC4.3 | 117.6,38.73 117.6,39.88 118.24,40.51 IC4.1 118.36,40.64 118.62,40.89 v119.25,40.89 | v128.14,45.59 129.16,45.59 Q1.2
  Bottom 0.127: v128.14,45.59 123.95,45.59 v119.25,40.89
N$2
  Top 0.127: J1.24 77.22,14.1 77.22,19.18 76.83,19.56 EPD_C12.1
N$3
  Top 0.127: R2-USB1.2 149.86,46.23 153.42,46.23 159.77,52.58 164.08,52.58 J2.A5
N$4
  Top 0.127: CHG_LED.C 117.09,50.67 114.81,50.67 R1_BAT.2
N$5
  Top 0.127: C4.1 92.33,30.73 91.69,30.73 90.81,29.84 D4.1 90.68,29.72 D3.2
N$6
  Top 0.127: R1_BAT.1 113.54,50.55 114.3,49.78 121.92,49.78 123.19,48.51 MCP737831.1
N$7
  Top 0.127: R2_BAT.2 120.52,44.7 121.16,45.34 121.16,48.13 120.78,48.51 MCP737831.5
N$8
  Top 0.127: J1.23 77.85,14.1 77.85,19.3 78.11,19.56 EPD_C11.1
N$9
  Top 0.127: R2-USB.1 163.19,56.01 163.58,55.63 164.08,55.63 J2.B5
N$10
  Top 0.127: J1.22 78.36,14.1 78.36,18.54 79.5,19.68 EPD_C10.1
N$11
  Top 0.127: J1.21 78.87,14.1 78.87,17.4 81.03,19.56 EPD_C9.1
N$12
  Top 0.127: J1.20 79.38,14.1 79.38,16.38 82.55,19.56 EPD_C8.1
N$13
  Top 0.127: J1.19 79.76,14.1 79.76,15.24 84.07,19.56 EPD_C7.1
N$14  (via drill 0.3)
  Top 0.127: v82.8,13.21 81.53,11.94 80.64,11.94 80.26,12.32 80.26,13.97 J1.18 | v86.36,20.32 85.72,19.68 EPD_C6.1
  Bottom 0.127: v82.8,13.21 82.8,13.46 86.36,17.02 v86.36,20.32
N$15
  Top 0.127: C_DELAY.1 51.56,102.36 50.04,102.36 49.91,102.49 IC1.5
N$18
  Top 0.127: R1.2 18.92,45.85 18.92,48.9 U2.10
N$22
  Top 0.127: J1.8 85.34,14.1 85.34,16.64 87.88,19.18 87.88,20.32 88.52,20.95 EPD_C2.2 88.65,21.08 90.04,21.08 EPD_C1.2
N$23
  Top 0.127: J1.4 87.38,14.1 87.38,17.02 90.04,19.68 EPD_C1.1
N$24
  Top 0.127: J1.5 86.87,14.1 86.87,17.78 88.52,19.43 88.52,19.68 EPD_C2.1
N$26  (via drill 0.3)
  Top 0.127: v91.31,63.25 91.31,54.74 R_CAPACITOR.2 | v90.04,66.55 89.41,67.18 D7.1
  Bottom 0.127: v91.31,63.25 91.31,65.28 v90.04,66.55
N$27
  Top 0.127: C8.1 86.11,51.18 87.38,52.45 90.42,52.45 91.31,53.34 R_CAPACITOR.1 91.44,53.34 C10_SUPERCAP.2
RESE
  Top 0.127: J1.3 87.63,13.97 87.63,13.46 85.85,11.68 78.23,11.68 73.56,16.36 72.88,16.36 72.77,16.47 72.77,16.87 72.24,17.4 71.25,17.4 70.36,16.51 R3.1 70.36,16.38 69.98,16 66.29,16 Q3.2
RESE'
  Top 0.127: SJ1.2 65.66,11.43 67.18,12.95 R2.2 67.31,13.08 68.58,13.08 71.63,16.13 71.63,16.38 R3.2
RESET
  Top 0.127: IC1.1 46.99,102.62 46.35,102.62 40.13,108.84 27.18,108.84 R_RESET.2 27.05,108.97 26.29,108.97 25.78,109.47 RESET_BUTTON.3 25.65,109.6 22.23,109.6 RESET_BUTTON.4 22.1,109.47 20.32,109.47 20.19,109.35 20.19,108.33 | 20.19,108.33 20.83,107.7 C5.1 | 20.19,108.33 8.51,108.33 0.89,100.71 0.89,79.88 6.35,74.42 6.35,62.61 10.03,58.93 10.03,49.02 U2.3
RTC_RST
  Top 0.127: U2.16 22.86,66.29 23.37,65.79 23.37,65.66 24.64,64.39 83.82,64.39 84.71,63.5 84.71,63.12 U3.4
RX
  Top 0.127: U2.24 12.7,66.42 12.7,70.1 12.95,70.36 TP2.TP
SCK  (via drill 0.3)
  Top 0.127: TP8.TP 22.1,98.55 21.84,98.3 15.49,98.3 D10.2 15.37,98.17 v14.48,97.28 | v10.03,94.36 10.03,94.11 7.11,91.19 5.97,91.19 J4.P5 | v82.8,15.11 82.8,14.1 J1.13 | v75.56,21.59 75.56,23.62 75.44,23.75 73.79,23.75 73.28,23.24 R6.1 | 22.99,44.83 19.68,44.83 19.43,45.09 16.76,45.09 16.64,44.96 16.38,44.96 13.97,47.37 13.97,48.9 U2.6 | 22.99,44.83 23.75,44.83 24.77,45.85 24.77,51.56 32.89,59.69 34.16,59.69 v35.43,60.96 35.69,61.21 41.91,61.21 42.42,60.71 42.42,58.93 41.78,58.29 41.78,58.04 U1.6 | 22.99,44.83 v22.99,45.09
  Bottom 0.127: 11.56,94.36 v10.03,94.36 | v14.48,97.28 11.56,94.36 | v82.8,15.11 82.04,15.11 81.92,15.24 | v75.56,21.59 81.92,15.24 | 81.92,15.24 78.36,11.68 56.39,11.68 v22.99,45.09 | 11.56,94.36 11.56,84.84 v35.43,60.96
SCL  (via drill 0.3)
  Top 0.127: 154.81,8.64 154.81,8.76 154.31,9.27 SENSOR2.4 | 154.81,8.64 154.81,6.6 154.18,5.97 R2_PINH.1 | v162.69,19.43 163.96,20.7 164.34,20.7 J3.4 | 154.81,8.64 v154.56,8.64 | v132.33,52.7 131.57,52.7 U4.7 | v89.28,53.09 88.65,53.72 U3.16 | v18.54,65.28 17.78,66.04 17.78,66.29 U2.20
  Bottom 0.127: v154.56,8.64 154.56,11.3 v162.69,19.43 162.69,22.35 v132.33,52.7 89.66,52.7 v89.28,53.09 41.91,53.09 29.72,65.28 v18.54,65.28
SDA  (via drill 0.3)
  Top 0.127: 154.56,10.03 155.07,9.53 155.07,5.71 154.56,5.21 153.54,5.21 153.03,5.71 R1_PINH.1 | 154.56,10.03 154.31,10.03 SENSOR2.3 154.56,10.03 | v163.32,19.43 163.58,19.68 164.34,19.68 J3.3 | v155.07,11.18 155.07,10.54 154.56,10.03 | v130.18,54.61 131.44,53.34 U4.8 | v89.28,54.61 88.9,54.99 88.14,54.99 87.38,54.23 87.38,53.85 U3.15 | v78.99,62.48 22.73,62.48 19.56,65.66 19.56,65.79 19.05,66.29 U2.19
  Bottom 0.127: v155.07,11.18 v163.32,19.43 163.32,22.35 131.06,54.61 v130.18,54.61 v89.28,54.61 81.41,62.48 v78.99,62.48
SRC  (via drill 0.3)
  Top 0.127: v91.69,31.5 92.33,32.13 C4.2 | v86.87,31.5 82.04,31.5 81.92,31.37 78.49,31.37 | 78.49,31.37 77.85,32 D5.2 | v68.58,19.3 67.31,18.03 65.66,18.03 Q3.3 | v75.82,26.54 76.58,26.54 77.47,27.43 | 78.49,31.37 78.49,28.45 77.47,27.43 | 77.47,27.43 L1.1
  Bottom 0.127: v86.87,31.5 v91.69,31.5 | v75.82,26.54 v68.58,19.3
SS_SD  (via drill 0.3)
  Top 0.127: v62.1,22.86 R10.1 | v30.35,53.47 29.72,53.47 29.59,53.34 D8.2 | U2.4 11.43,49.02 11.43,49.28 v15.88,53.72 15.37,54.23 v15.37,55.37 | v9.65,84.58 6.48,87.76 J4.P2
  Bottom 0.127: v62.1,22.86 31.5,53.47 v30.35,53.47 30.1,53.72 v15.88,53.72 | v9.65,84.58 9.65,61.09 v15.37,55.37
TX
  Top 0.127: U2.25 11.3,66.42 11.3,69.72 10.67,70.36 TP1.TP
USB_D+  (via drill 0.3)
  Top 0.127: v129.67,54.1 129.67,54.74 130.05,55.12 134.37,55.12 137.92,51.56 148.21,51.56 D1.1 | v34.67,60.96 32.77,60.96 30.35,58.55 30.35,57.53 24.13,51.31 24.13,49.02 U2.14
  Bottom 0.127: v129.67,54.1 41.53,54.1 v34.67,60.96
USB_D-  (via drill 0.3)
  Top 0.127: v129.41,49.78 145.41,49.78 145.54,49.66 148.21,49.66 D1.3 | v30.1,50.67 v36.7,50.67 | v23.62,50.04 22.86,49.28 22.86,49.02 U2.13
  Bottom 0.127: v129.41,49.78 85.72,49.78 84.84,50.67 v36.7,50.67 | v30.1,50.67 24.26,50.67 v23.62,50.04
VBAT
  Top 0.127: U4.3 129.67,52.32 129.67,52.7 U4.2 129.54,52.7 128.91,52.7 | 123.7,50.42 126.24,47.88 128.27,47.88 Q1.3 | 123.7,50.42 123.32,50.42 MCP737831.3 123.7,50.42 | 123.7,50.42 125.86,52.58 C2_BAT.1 125.98,52.7 128.91,52.7 | 128.91,52.7 128.91,53.34 129.16,53.59 129.16,58.42 TP3.TP
VBUS  (via drill 0.3)
  Top 0.127: v116.84,40.89 116.08,40.89 D2.2 | 116.84,48.64 v116.84,48.13 116.84,47.12 122.3,41.66 125.73,41.66 125.86,41.53 125.86,40.13 127,38.99 128.14,38.99 128.27,39.12 128.27,40.13 127.64,40.77 R1_PWRUSB.1 127.51,40.89 127.51,44.96 | 116.84,48.64 117.22,49.02 C1_BAT.1 | MCP737831.4 120.65,50.55 118.62,50.55 CHG_LED.A 118.62,50.67 118.62,51.31 | 118.62,51.31 118.62,56.39 118.75,56.52 TP14.TP | 116.84,48.64 114.3,48.64 112.9,50.04 112.9,51.05 113.16,51.31 118.62,51.31 | 127.51,44.96 127.51,45.47 127.38,45.59 Q1.1 | D1.5 150.75,50.42 150.37,50.42 149.99,50.04 149.99,47.5 C5_USB.1 149.86,47.37 149.1,46.61 149.1,45.59 147.07,43.56 146.69,43.56 PFMF.050.1.2 146.56,43.56 145.16,44.96 | 145.16,44.96 145.03,45.09 145.03,49.15 C4_USB.1 | 145.16,44.96 127.51,44.96
  Bottom 0.127: v116.84,48.13 v116.84,40.89
VUSB
  Top 0.127: J2.A9 164.08,56.26 164.08,56.13 J2.B4 164.21,56.01 164.72,56.01 165.23,55.5 165.23,52.07 164.85,51.69 164.21,51.69 J2.B9 164.08,51.56 164.08,51.31 J2.A4 164.08,51.18 158.75,51.18 151.13,43.56 PFMF.050.1.1